# EAGLE board thermal-flashlight (EAGLE 6.4)
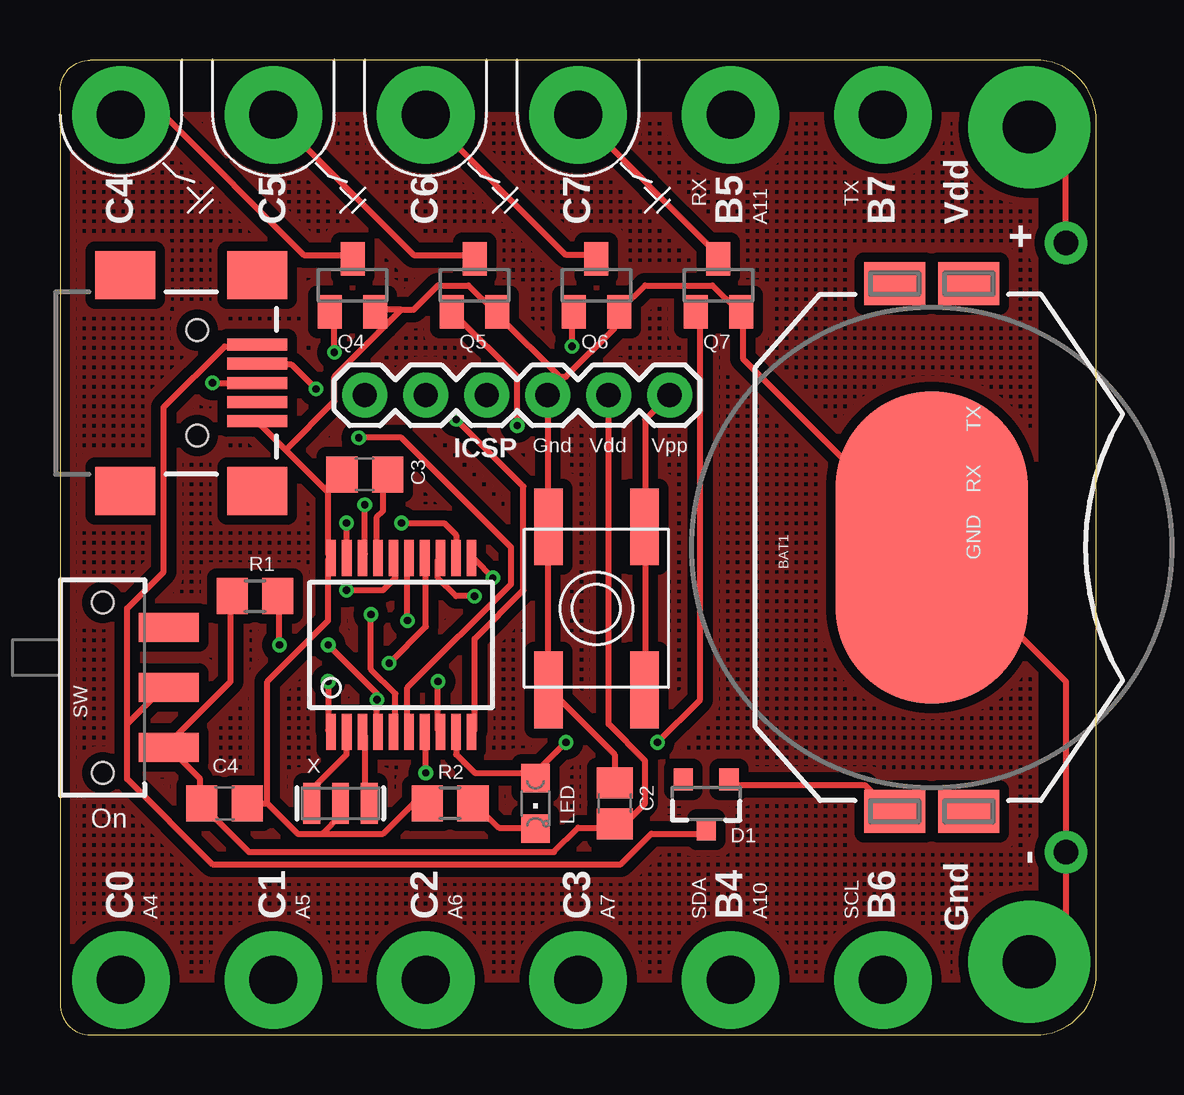
[diagram p0: board, top side]
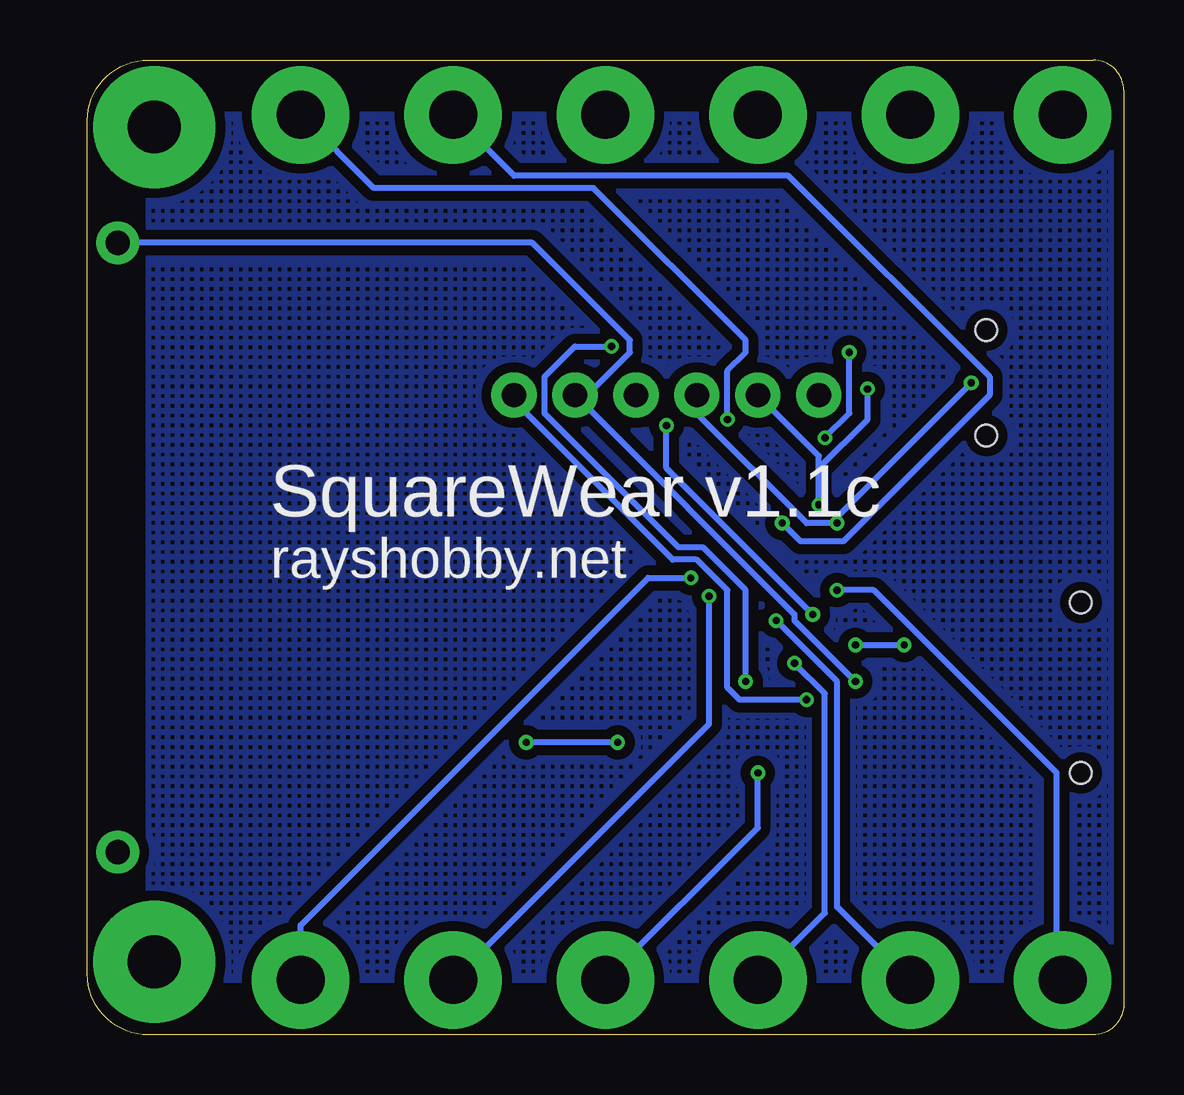
[diagram p1: board, bottom side, seen from below]

Size 43.18 x 40.64 mm. Coordinates in mm from the lower left corner, seen from the top.
Outline: 1.27,0 40.64,0 arc90 43.18,2.54 43.18,38.1 arc90 40.64,40.64 1.27,40.64 arc90 0,39.37 0,1.27 arc90 1.27,0
Copper layers (1*16): Top 0.035mm / dielectric 1.5mm / Bottom 0.035mm
Design rules "Fusion_eagle_rule_v1.1 *": minimum track width 6mil, minimum drill 12mil, track to track 6mil, track to pad 6mil, pad to pad 6mil, via to via 6mil, smd to smd 0mil, copper to edge 10mil, drill to drill 10mil, minimum pad ring 10mil, minimum via ring 6mil, stop-mask expansion 2mil, vias tented up to drill 100mil, thermal gap 20mil
Net classes: 0 default: width 0.254 mm, clearance 0.203 mm; 1 power: width 0.254 mm, clearance 0.203 mm
vRestrict: area 36.8,4.3 to 37.8,7.1; area 36.8,33.8 to 37.8,36.6; area 37.6,25.1 to 38.4,26.2; area 37.6,22.6 to 38.4,23.6; area 37.6,19.8 to 38.4,21.3; area 7.9,19.3 to 8.9,20.1; area 7.9,13.2 to 8.9,14; area 16,24.1 to 26.2,24.9; area 1.8,4.8 to 35.3,6.6; area 1.8,33.8 to 34.8,35.6; area 10.7,29.5 to 13.7,33; area 15.7,29.5 to 18.8,33; 4 more areas

## Footprints (pad centres in the part's own frame; a part is rotated, then mirrored left to right if it is on the bottom)
BATTCON_20MM_4LEGS = smd 1.778 x 2.54: 1 -11,1.55; 3 11,1.55; P$1 -11,-1.55; P$2 11,-1.55 | smd 13 x 8: 2 0,0
EVQ-Q2 = smd 3.2 x 1.2: A -3.4,-2; A' 3.4,-2; B -3.4,2; B' 3.4,2
C0805 = smd 1.3 x 1.5: 1 -0.85,0; 2 0.85,0
C0805' = smd 1.3 x 1.5: 1 -0.95,0; 2 0.95,0
SOT23-3 = smd 0.8 x 0.9: 1 -0.95,-1; 2 0.95,-1; 3 0,1.1
1X06 = drill 1.016 pad 1.88: 1 0,0; 2 2.54,0; 3 5.08,0; 4 7.62,0; 5 10.16,0; 6 12.7,0
1X01-CLEANBIG = drill 1.016 pad 1.778: 1 0,0
CHIPLED_0805 = smd 1.2 x 1.2: A 0,-1.05; C 0,1.05
PETAL-SMALL-2SIDE1 = drill 2 pad 4.064: 1 0,0
PETAL-SMALL-2SIDE11 = drill 2.2 pad 5.08: 1 0,0
SOT23 = smd 1 x 1.4: 1 -0.95,-1.1; 2 0.95,-1.1; 3 0,1.1
R0805@1 = smd 1.3 x 1.5: 1 -0.95,0; 2 0.95,0
R0805 = smd 1.3 x 1.5: 1 -0.95,0; 2 0.95,0
SWITCH-SPDT-SMD = smd 1.2 x 2.5: 1 -2.5,-2.75; 2 0,-2.75; 3 2.5,-2.75 | hole 0.9: -3.55,0; 3.55,0
SSOP20 = smd 0.4 x 1.5: 1 -2.925,-3.625; 2 -2.275,-3.625; 3 -1.625,-3.625; 4 -0.975,-3.625; 5 -0.325,-3.625; 6 0.325,-3.625; 7 0.975,-3.625; 8 1.625,-3.625; 9 2.275,-3.625; 10 2.925,-3.625; 11 2.925,3.625; 12 2.275,3.625; 13 1.625,3.625; 14 0.975,3.625; 15 0.325,3.625; 16 -0.325,3.625; 17 -0.975,3.625; 18 -1.625,3.625; 19 -2.275,3.625; 20 -2.925,3.625
RESONATOR-SMD = smd 0.7 x 1.7: 1 -1.2,0; 2 0,0; 3 1.2,0
USB-MINIB = smd 2.5 x 0.5: D+ 2.5,0; D- 2.5,0.8; GND 2.5,-1.6; ID 2.5,-0.8; VBUS 2.5,1.6 | smd 2.5 x 2: GND@1 -3,-4.5; GND@2 -3,4.5; GND@3 2.5,4.5; GND@4 2.5,-4.5 | hole 0.9: 0,2.2; 0,-2.2

## Placement (x,y rotation side)
BAT1  [BATTCON_20MM_4LEGS]  36.32,20.32 90 top
BTN  [EVQ-Q2]  22.35,17.78 270 top
C2  10u  [C0805]  23.11,9.65 90 top
C3  0.1uF  [C0805']  12.7,23.37 180 top
C4  0.1uF  [C0805']  6.86,9.65 0 top
D1  [SOT23-3]  26.92,9.65 180 top
ICSP  [1X06]  25.4,26.67 180 top
JP+  [1X01-CLEANBIG]  41.91,33.02 90 top
JP-  [1X01-CLEANBIG]  41.91,7.62 90 top
LED  0805  [CHIPLED_0805]  19.81,9.65 180 top
PB4  [PETAL-SMALL-2SIDE1]  27.94,2.29 180 top
PB5  SEWTAP6  [PETAL-SMALL-2SIDE1]  27.94,38.35 180 top
PB6  SEWTAP6  [PETAL-SMALL-2SIDE1]  34.29,2.29 180 top
PB7  SEWTAP6  [PETAL-SMALL-2SIDE1]  34.29,38.35 180 top
PC0  SEWTAP6  [PETAL-SMALL-2SIDE1]  2.54,2.29 0 top
PC1  SEWTAP6  [PETAL-SMALL-2SIDE1]  8.89,2.29 0 top
PC2  SEWTAP6  [PETAL-SMALL-2SIDE1]  15.24,2.29 0 top
PC3  SEWTAP6  [PETAL-SMALL-2SIDE1]  21.59,2.29 0 top
PG  SEWTAP6  [PETAL-SMALL-2SIDE11]  40.39,3.05 270 top
PSC4  SEWTAP6  [PETAL-SMALL-2SIDE1]  2.54,38.35 90 top
PSC5  SEWTAP6  [PETAL-SMALL-2SIDE1]  8.89,38.35 180 top
PSC6  SEWTAP6  [PETAL-SMALL-2SIDE1]  15.24,38.35 180 top
PSC7  SEWTAP6  [PETAL-SMALL-2SIDE1]  21.59,38.35 0 top
PVCC  SEWTAP6  [PETAL-SMALL-2SIDE11]  40.39,37.85 180 top
Q4  BSS123  [SOT23]  12.19,31.24 0 top
Q5  BSS123  [SOT23]  17.27,31.24 0 top
Q6  BSS123  [SOT23]  22.35,31.24 0 top
Q7  BSS123  [SOT23]  27.43,31.24 0 top
R1  10k  [R0805@1]  8.13,18.29 180 top
R2  3.3K  [R0805]  16.26,9.65 0 top
SW  SPDT  [SWITCH-SPDT-SMD]  1.78,14.48 90 top
U$1  PIC18F1X50-I/SS  [SSOP20]  14.22,16.26 0 top
X  12MHz  [RESONATOR-SMD]  11.68,9.65 0 top
X1  USBSMD  [USB-MINIB]  5.71,27.18 0 top

## Library data of the parts
BAT1 ICSP X = SparkFunNew
BTN JP+ JP- = adafruit
C2 = resistor
C3 C4 R1 R2 = rcl
D1 SW X1 = SparkFun
LED = led
PB4-PB7 PC0 PC1-PC3 PG PSC4-PSC7 PVCC = LilyPad-Wearables
Q4-Q7 = transistor-small-signal
U$1 = Forrequi

## Nets
GND: BAT1.2 BTN.A BTN.A' C2.2 C3.2 C4.2 ICSP.3 JP-.1 PG.1 Q4.2 Q5.2 Q6.2 Q7.2 R2.1 U$1.20 X1.GND X.2
N$2: U$1.2 X.1
N$3: U$1.3 X.3
N$14: LED.C R2.2
PGC: ICSP.5 U$1.18 X1.D-
PGD: ICSP.4 U$1.19 X1.D+
RB4: PB4.1 U$1.13
RB5: PB5.1 U$1.12
RB6: PB6.1 U$1.11
RB7: PB7.1 U$1.10
RC0: PC0.1 U$1.16
RC1: PC1.1 U$1.15
RC2: PC2.1 U$1.14
RC3: PC3.1 U$1.7
RC4: Q4.1 U$1.6
RC5: Q5.1 U$1.5
RC6: Q6.1 U$1.8
RC7: LED.A Q7.1 U$1.9
SC4: PSC4.1 Q4.3
SC5: PSC5.1 Q5.3
SC6: PSC6.1 Q6.3
SC7: PSC7.1 Q7.3
VBAT: BAT1.1 D1.1
VBUS: D1.3 SW.2 X1.VBUS
VDD: C2.1 C4.1 ICSP.2 JP+.1 PVCC.1 R1.2 SW.1 U$1.1
VPP: BTN.B BTN.B' ICSP.1 R1.1 U$1.4
VUSB: C3.1 U$1.17

## Tracks (layer width: path | path; a pad name or v marks a point on that pad's centre or on a via)
GND
  Top 0.254: 8.64,9.65 9.91,8.38 10.92,8.38 | 10.92,8.38 11.68,9.14 X.2 | C4.2 8.64,9.65 | 10.92,8.38 13.46,8.38 14.73,9.65 R2.1 | 11.18,22.61 11.18,22.86 11.68,23.37 C3.2 | 11.18,22.61 11.18,20.07 U$1.20 11.18,19.81 11.18,17.27 8.64,14.73 8.64,9.65 | 11.18,22.61 9.4,24.38 | 9.4,24.38 8.38,25.4 X1.GND | C2.2 23.11,11.68 20.57,14.22 BTN.A' 20.32,14.48 20.32,21.08 BTN.A 20.32,21.34 ICSP.3 21.08,27.43 | 14.22,30.23 14.73,30.23 15.75,31.24 17.02,31.24 18.03,30.23 Q5.2 18.29,29.97 20.83,27.43 21.08,27.43 | 14.22,30.23 13.21,30.23 Q4.2 | 21.08,27.43 23.11,29.46 23.11,29.97 Q6.2 23.37,30.23 24.38,31.24 27.18,31.24 28.19,30.23 Q7.2 28.45,29.97 28.45,28.19 BAT1.2 41.91,14.73 JP-.1 41.91,4.57 PG.1 | 9.4,24.38 11.43,26.42 11.43,27.43 14.22,30.23
N$1
  pour Top (isolate 0.406, hatched): 0,38.35 40.64,38.35 40.64,2.29 0,2.29
N$2
  Top 0.254: U$1.2 11.94,12.45 11.94,11.68 10.67,10.41 10.67,9.65 X.1
N$3
  Top 0.254: U$1.3 12.7,12.45 12.7,9.65 X.3
N$4
  pour Bottom (isolate 0.406, hatched): 0,38.35 40.64,38.35 40.64,2.29 0,2.29
N$14
  Top 0.254: LED.C 19.81,8.64 18.29,8.64 17.27,9.65 R2.2
PGC  (via drill 0.3)
  Top 0.254: v12.7,22.1 12.7,20.07 U$1.18 | v10.67,26.92 9.65,27.94 8.38,27.94 X1.D-
  Bottom 0.254: 12.7,23.62 12.7,24.13 ICSP.5 | v12.7,22.1 12.7,23.62 | v10.67,26.92 10.67,25.65 12.7,23.62
PGD  (via drill 0.3)
  Top 0.254: v11.94,21.34 11.94,20.07 U$1.19 | v6.35,27.18 X1.D+
  Bottom 0.254: 12.19,21.34 13.21,21.34 17.78,25.91 ICSP.4 | 12.19,21.34 v6.35,27.18 | v11.94,21.34 12.19,21.34
RB4  (via drill 0.3)
  Top 0.254: v17.27,18.29 16.51,18.29 15.75,19.05 15.75,19.81 U$1.13
  Bottom 0.254: v17.27,18.29 17.27,12.95 PB4.1
RB5  (via drill 0.3)
  Top 0.254: v14.22,21.34 16,21.34 16.51,20.83 16.51,20.07 U$1.12
  Bottom 0.254: v14.22,21.34 13.46,20.57 11.68,20.57 5.59,26.67 5.59,27.43 13.97,35.81 25.4,35.81 PB5.1
RB6  (via drill 0.3)
  Top 0.254: v18.03,19.05 17.27,19.81 U$1.11
  Bottom 0.254: v18.03,19.05 19.81,19.05 34.29,4.57 PB6.1
RB7  (via drill 0.3)
  Top 0.254: v16.51,25.65 19.3,22.86 19.3,18.54 17.27,16.51 17.27,12.7 U$1.10
  Bottom 0.254: v16.51,25.65 16.51,27.69 15.75,28.45 15.75,28.96 22.1,35.31 31.24,35.31 PB7.1
RC0  (via drill 0.3)
  Top 0.254: v11.94,18.54 13.46,18.54 13.97,19.05 13.97,19.81 U$1.16
  Bottom 0.254: v11.94,18.54 10.41,18.54 2.79,10.92 2.79,2.54 PC0.1
RC1  (via drill 0.3)
  Top 0.254: v14.48,17.27 14.48,19.81 U$1.15
  Bottom 0.254: v14.48,17.27 11.94,14.73 11.94,5.33 PC1.1
RC2  (via drill 0.3)
  Top 0.254: v13.72,15.49 15.24,17.02 15.24,19.81 U$1.14
  Bottom 0.254: v13.72,15.49 12.45,14.22 12.45,5.08 PC2.1
RC3  (via drill 0.3)
  Top 0.254: v15.24,10.92 15.24,12.45 U$1.7
  Bottom 0.254: v15.24,10.92 15.24,8.64 PC3.1
RC4  (via drill 0.3)
  Top 0.254: v11.43,28.45 11.43,29.97 Q4.1 | v12.45,24.89 14.22,24.89 18.8,20.32 18.8,18.8 14.48,14.48 14.48,12.7 U$1.6
  Bottom 0.254: v11.43,28.45 11.43,25.91 v12.45,24.89
RC5  (via drill 0.3)
  Top 0.254: v19.05,25.4 19.05,27.43 16.51,29.97 Q5.1 | v12.95,17.53 12.95,15.24 13.97,14.22 13.97,12.7 U$1.5
  Bottom 0.254: v19.05,25.4 19.05,23.62 v12.95,17.53
RC6  (via drill 0.3)
  Top 0.254: v21.34,28.7 21.34,29.97 Q6.1 | v15.75,14.73 15.75,12.7 U$1.8
  Bottom 0.254: v21.34,28.7 22.86,28.7 24.13,27.43 24.13,25.91 18.54,20.32 17.53,20.32 15.75,18.54 v15.75,14.73
RC7  (via drill 0.3)
  Top 0.254: 19.81,10.92 17.27,10.92 16.51,11.68 16.51,12.45 U$1.9 | v24.89,12.19 26.67,13.97 26.67,29.97 Q7.1 | 19.81,10.92 v21.08,12.19 | 19.81,10.92 LED.A
  Bottom 0.254: v21.08,12.19 v24.89,12.19
SC4
  Top 0.254: PSC4.1 4.32,38.35 10.16,32.51 12.19,32.51 Q4.3
SC5
  Top 0.254: PSC5.1 14.73,32.51 17.27,32.51 Q5.3
SC6
  Top 0.254: PSC6.1 21.08,32.51 22.35,32.51 Q6.3
SC7
  Top 0.254: PSC7.1 27.43,32.51 Q7.3
VBAT
  Top 0.254: D1.1 27.94,10.41 33.53,10.41 34.54,9.4 BAT1.1
VBUS
  Top 0.254: 2.79,12.95 2.79,10.67 6.35,7.11 23.37,7.11 24.64,8.38 26.92,8.38 D1.3 | 2.79,12.95 4.32,14.48 SW.2 | 2.79,12.95 2.79,17.78 4.32,19.3 4.32,26.16 6.86,28.7 8.13,28.7 X1.VBUS
VDD  (via drill 0.3)
  Top 0.254: 5.84,9.65 5.84,10.67 4.57,11.94 SW.1 4.57,12.19 7.11,14.73 7.11,18.29 R1.2 | 5.84,9.65 7.87,7.62 20.57,7.62 21.59,8.64 23.11,8.64 C2.1 23.11,8.89 23.62,8.89 24.38,9.65 24.38,11.43 22.86,12.95 ICSP.2 | C4.1 5.84,9.65 | JP+.1 41.91,36.32 PVCC.1 | v11.18,14.73 11.18,12.7 U$1.1
  Bottom 0.254: v11.18,14.73 13.72,17.27 13.72,17.53 22.61,26.42 | JP+.1 24.64,33.02 20.57,28.96 20.57,28.45 22.61,26.42 | ICSP.2 22.61,26.42
VPP  (via drill 0.3)
  Top 0.254: BTN.B' 24.38,14.48 24.38,21.08 BTN.B 24.38,21.34 24.38,25.65 ICSP.1 | U$1.4 13.21,12.7 v13.21,13.97 13.21,14.22 v11.18,16.26 | v9.14,16.26 9.14,18.29 R1.1
  Bottom 0.254: v13.21,13.97 16,13.97 16.51,14.48 16.51,18.54 17.78,19.81 18.8,19.81 25.4,26.42 ICSP.1 | v11.18,16.26 v9.14,16.26
VUSB
  Top 0.254: U$1.17 13.21,20.07 13.21,21.59 13.46,21.84 13.46,23.37 C3.1

## Text on the board
tNames: RX | TX | C4 | C5 | C6 | C7 | B5 | A11 | B7 | Vdd | + | Gnd | Vdd | Vpp | TX | RX | GND | On | - | C0 | A4 | C1 | A5 | C2 | A6 | C3 | A7 | SDA | B4 | A10 | SCL | B6 | Gnd
bNames: SquareWear v1.1c | rayshobby.net